# Altium PCB PCB_7805.PcbDoc
Units mil, origin at the board's own origin, x right, y up, seen from the top; angles counter-clockwise.
Board outline 3015 x 790 mil, 2 copper layers (Top Layer, Bottom Layer); 10 components, 5 nets, 22 pads, 1 vias.
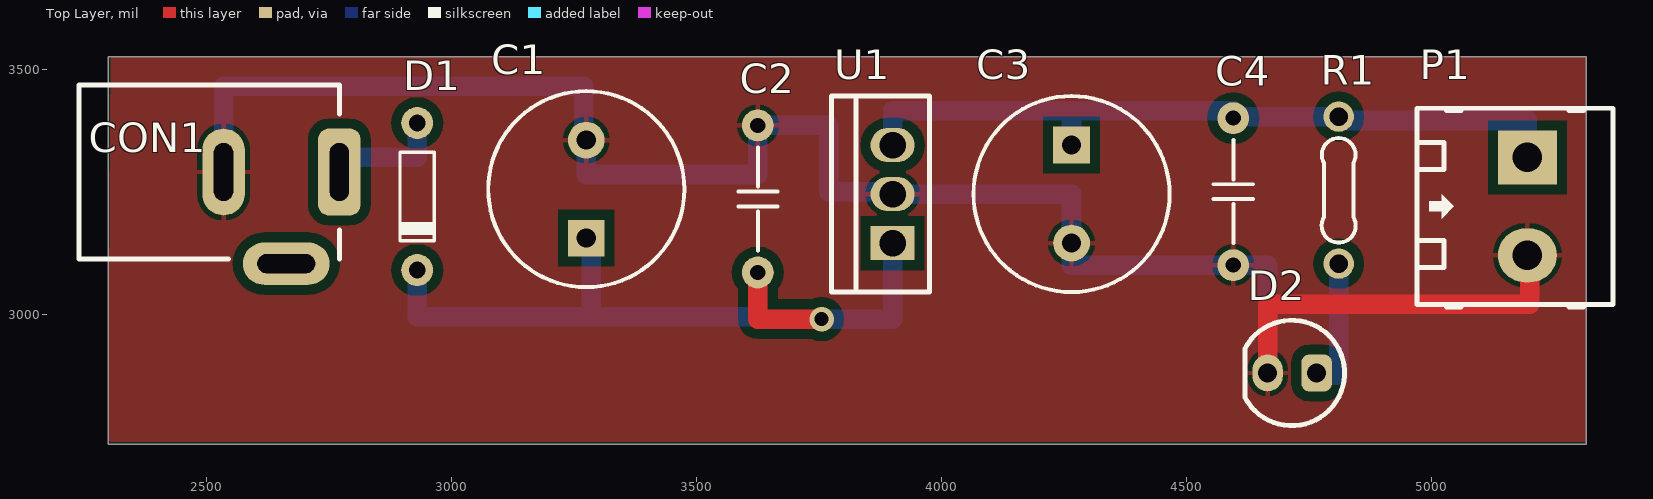
[diagram p0: Top Layer view]
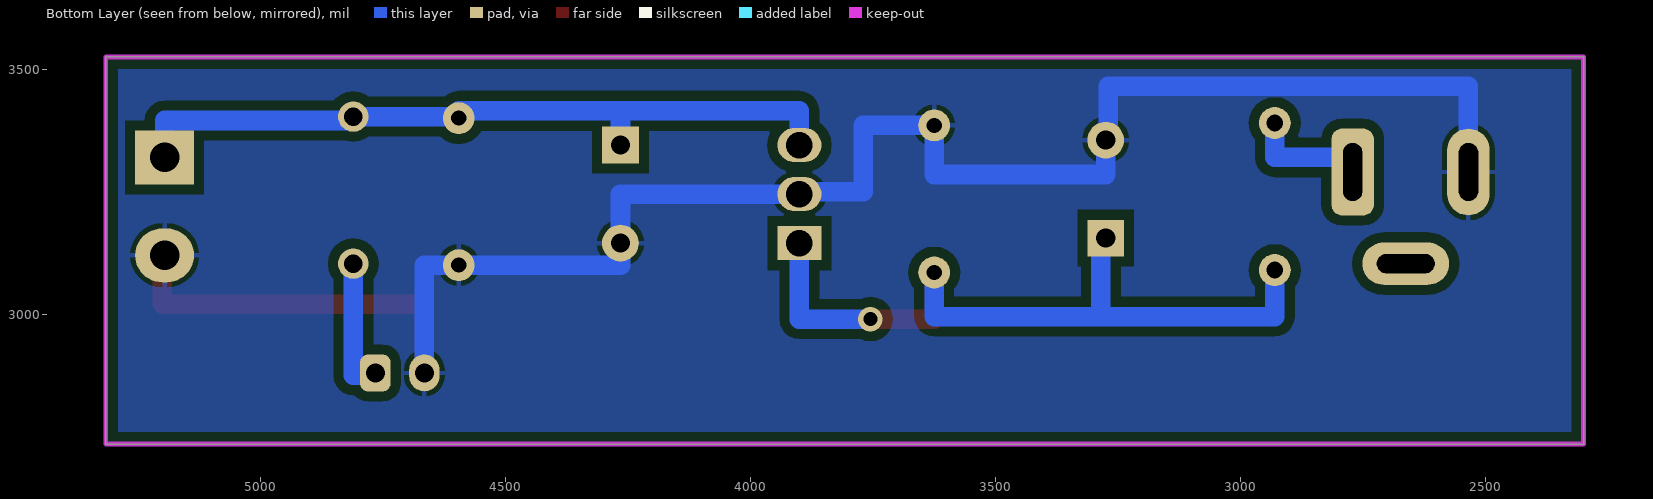
[diagram p1: Bottom Layer view, seen from below]
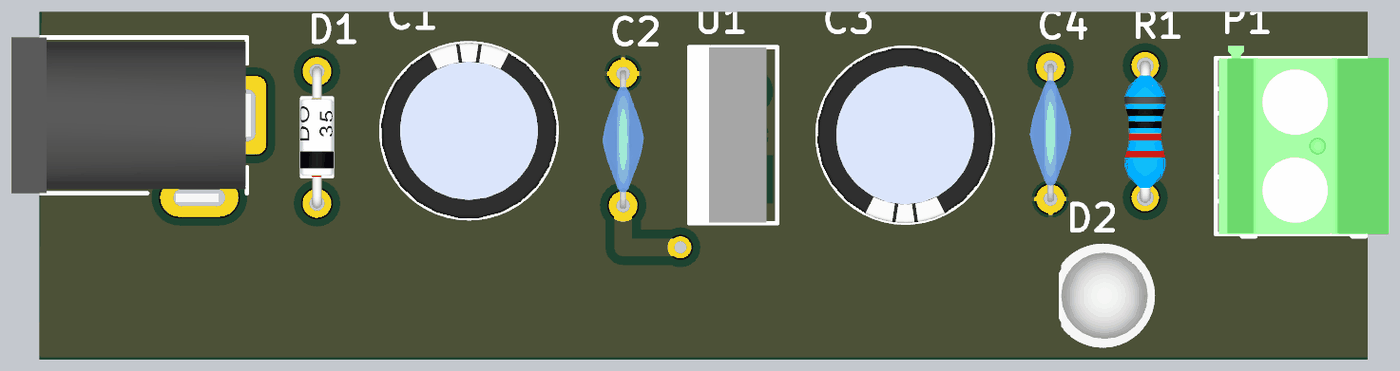
[diagram p2: 3D render of the assembled board from above, using the file's embedded part models]

## Layer stack, top to bottom
Top Solder: solder mask 0.4, Solder Resist, Dk 3.5
Top Layer: signal copper 1.4
Dielectric 1: dielectric 12.6, FR-4, Dk 4.8
Bottom Layer: signal copper 1.4
Bottom Solder: solder mask 0.4, Solder Resist, Dk 3.5

## Board outline
2300,2735 2300,3525 5315,3525 5315,2735

## Design rules (kind name [scope] priority, off if disabled: settings)
Clearance [All] p1: gap=20 ignorepadtopadclearanceinfootprint=FALSE
PolygonConnect [All] p1: connectstyle=Relief reliefconductorwidth=10 reliefentries=4 polygonreliefangle="90 Angle" airgapwidth=10
RoutingVias [All] p1: holewidth=28 width=50 viastyle="Through Hole" minholewidth=28 minwidth=50 maxholewidth=28 maxwidth=50
SolderMaskExpansion [All] p1: expansion=4
Width [All] p1: maxlimit=100 minlimit=20 preferedwidth=40
30 further rules are at their usual default settings.

## Components (designator, comment, footprint, x,y, rotation, side; value= is the part's Value field where it differs from the comment)
C1 "1000uF" CYL/D.400/LS.200 3275,3255 r90 top
C2 "104" "CAP Ceramic/W300" 3625,3085 r90 top
C3 "1000uF" CYL/D.400/LS.200 4265,3245 r270 top
C4 "104" "CAP Ceramic/W300" 4595,3400 r270 top
CON1 "CON DC PWR" CONN/DC/PWR/5.0MM 2771.22,3290 r0 top
D1 "1N4007" "DO-35 (SOD27 )" 2930,3390 r270 top
D2 "Led" "LED 5MM - RED" 4715,2880 r180 top
P1 "Header 2" HDR/Terminal/2 5195,3220 r270 top
R1 "1K" "R 1/4W/300" 4810,3402.99 r270 top
U1 "78xx" TO-220 3900,3145 r90 top

## Footprints (in the part's own frame and the unit in brackets; to place one, negate y for a bottom-side part, rotate by r counter-clockwise, add the part's x,y. Pads: shape width x height; smd on the part's side, far side on the other; paste and mask are expansions set on the pad)
"CAP Ceramic/W300" [mil]
  round 65 hole 31: 1(0,0) 2(300,0)
  silkscreen extent 45,-40 255,40, body extent -8,-47 307,47, height 340
CONN/DC/PWR/5.0MM [mm]
  rrect50% 2.2x4.5 hole 1 slot 3 at 90 deg: 1(0,0)
  oval 2.2x4.5 hole 1 slot 3 at 90 deg: 2(-6,0)
  oval 4.5x2.2 hole 1 slot 3 at 0 deg: 3(-2.75,-4.75)
  silkscreen extent -13.5,-4.5 0,4.5, body extent -13.58,-5 0.25,4.5, height 11.02
CYL/D.400/LS.200 [mil]
  rect 75x75 hole 39: 1(-100,0)
  round 75 hole 39: 2(100,0)
  silkscreen extent -200,-200 200,200, body extent -198,-199 200,199, height 500
"DO-35 (SOD27 )" [mil]
  round 65 hole 34: 1(0,0) 2(300,0)
  silkscreen extent 60,-35 240,35, body extent -11,-38 311,38, height 78
HDR/Terminal/2 [mil] "Header 2, 2 pin, hight 400mil, Pin to Pin 200mil, Colour Green"
  rect 110x120 hole 60: 1(-100,0)
  oval 110x120 hole 60: 2(100,0)
  silkscreen extent -200,-225 205,175, body extent -229,-218 200,168, height 559
"LED 5MM - RED" [mil]
  rrect50% 62x75 hole 39: 1(-50,0)
  oval 62x75 hole 39: 2(50,0)
  silkscreen extent -107,-108 96,108, body extent -117,-118 96,119, height 340
"R 1/4W/300" [mil] "Through hole resitor, axial 300mils, 1/4W"
  round 62 hole 38: 1(0,0) 2(300,0)
  silkscreen extent 44,-35 257,35, body extent -12,-47 312,47, height 97
TO-220 [mil]
  rect 70x90 hole 54: 1(0,0)
  oval 70x90 hole 54: 2(100,0) 3(200,0)
  silkscreen extent -100,-75 300,125, body extent -100,-50 300,130, height 730

## Part data
C1 C3: library part Capacitor, "Capacitor pol"
C2 C4: library part "Capacitor NP", "Capacitor non-pol"
CON1: "DC input connector"
D1: library part Diode, "Default Diode"
D2: "Typical LED"
P1: "Header, 2-Pin"
R1: library part Resistor, "Resistor"
U1: "LDO Fixed Voltage regulator"

## Via types
v1: diameter 50, hole 28, Top Layer to Bottom Layer, 1 vias

## Nets (pads, with @x,y where several pads share a name; then routed paths per layer and width w, separated by ;. In a path a pad name is that pad's centre, name@x,y a point inside that pad or via, vN(x,y) a via of type N, cw(c..) or ccw(c..) an arc to the next point about the centre after c; other vN are vias at no path point)
+5: C3.1 C4.1 P1.1 R1.1 U1.3 | length 1533
  Bottom Layer w40: U1.3 3900,3415 4265,3415 ; C3.1 4265,3415 ; C4.1 C4.1@4595,3402.99 ; P1.1 5195,3395 4810,3395 R1.1 C4.1@4595,3402.99 ; 4265,3415 4595,3415 C4.1@4595,3402.99
GND: C1.2 C2.2 C3.2 C4.2 CON1.2 D2.2 P1.2 U1.2 | length 3870
  Top Layer w40: D2.2 4665,3020 5200,3020 5200,3120 P1.2
  Bottom Layer w40: CON1.2 2535,3465 3270,3465 3270,3355 C1.2 3275,3285 3625,3285 C2.2 3770,3385 3770,3250 3900,3250 U1.2 4265,3245 C3.2 4265,3100 C4.2 4665,3100 D2.2
NetC1_1: C1.1 C2.1 D1.2 U1.1 | length 1575
  Top Layer w40: C2.1 3625,2990 v1(3755,2990)
  Bottom Layer w40: D1.2 2930,2995 3285,2995 ; C1.1 3285,3155 3285,2995 ; C2.1 3625,2995 3285,2995 ; v1(3755,2990) 3900,2990 U1.1
NetCON1_1: CON1.1 D1.1 | length 258.8
  Bottom Layer w40: CON1.1 2771.22,3320 2930,3320 D1.1
NetD2_1: D2.1 R1.2 | length 278
  Bottom Layer w40: D2.1 4765,2875 4810,2875 R1.2
pads on no net: CON1.3

## Polygon pours and split planes (outlines as drawn)
GND on Bottom Layer (solid, remove dead copper, pour order 2): 2305,3525 5315,3525 5315,2735 2300,2735
no net on Bottom Layer (solid, pour order 0): 2310,3525
GND on Top Layer (solid, remove dead copper, pour order 4): 2305,3525 5315,3525 5315,2740 2300,2740 2300,2735

## Keep-outs
Bottom Layer:
  lines w10: 2300,2735 5310,2735 5315,2735 5315,3525 2300,3525 2300,2735